# Altium PCB MLX9039SLW.PcbDoc
Units mm, origin at the board's own origin, x right, y up, seen from the top; angles counter-clockwise.
Board outline 28 x 28 mm, 2 copper layers (Top Layer, Bottom Layer); 13 components, 11 nets, 53 pads, 32 vias.
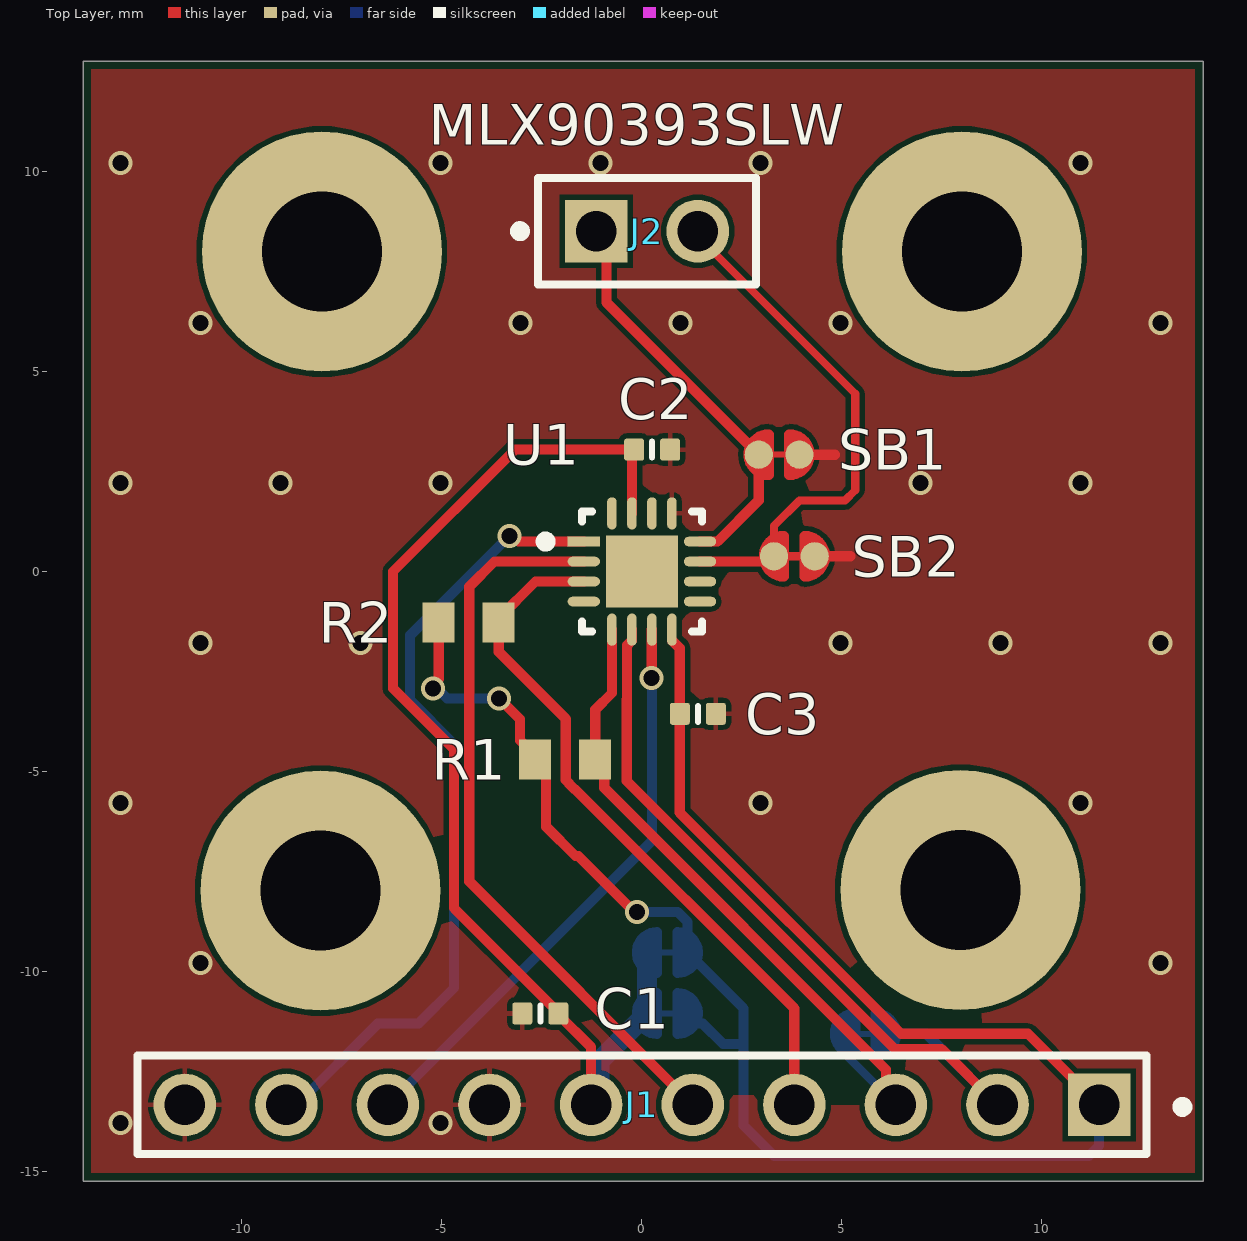
[diagram p0: Top Layer view]
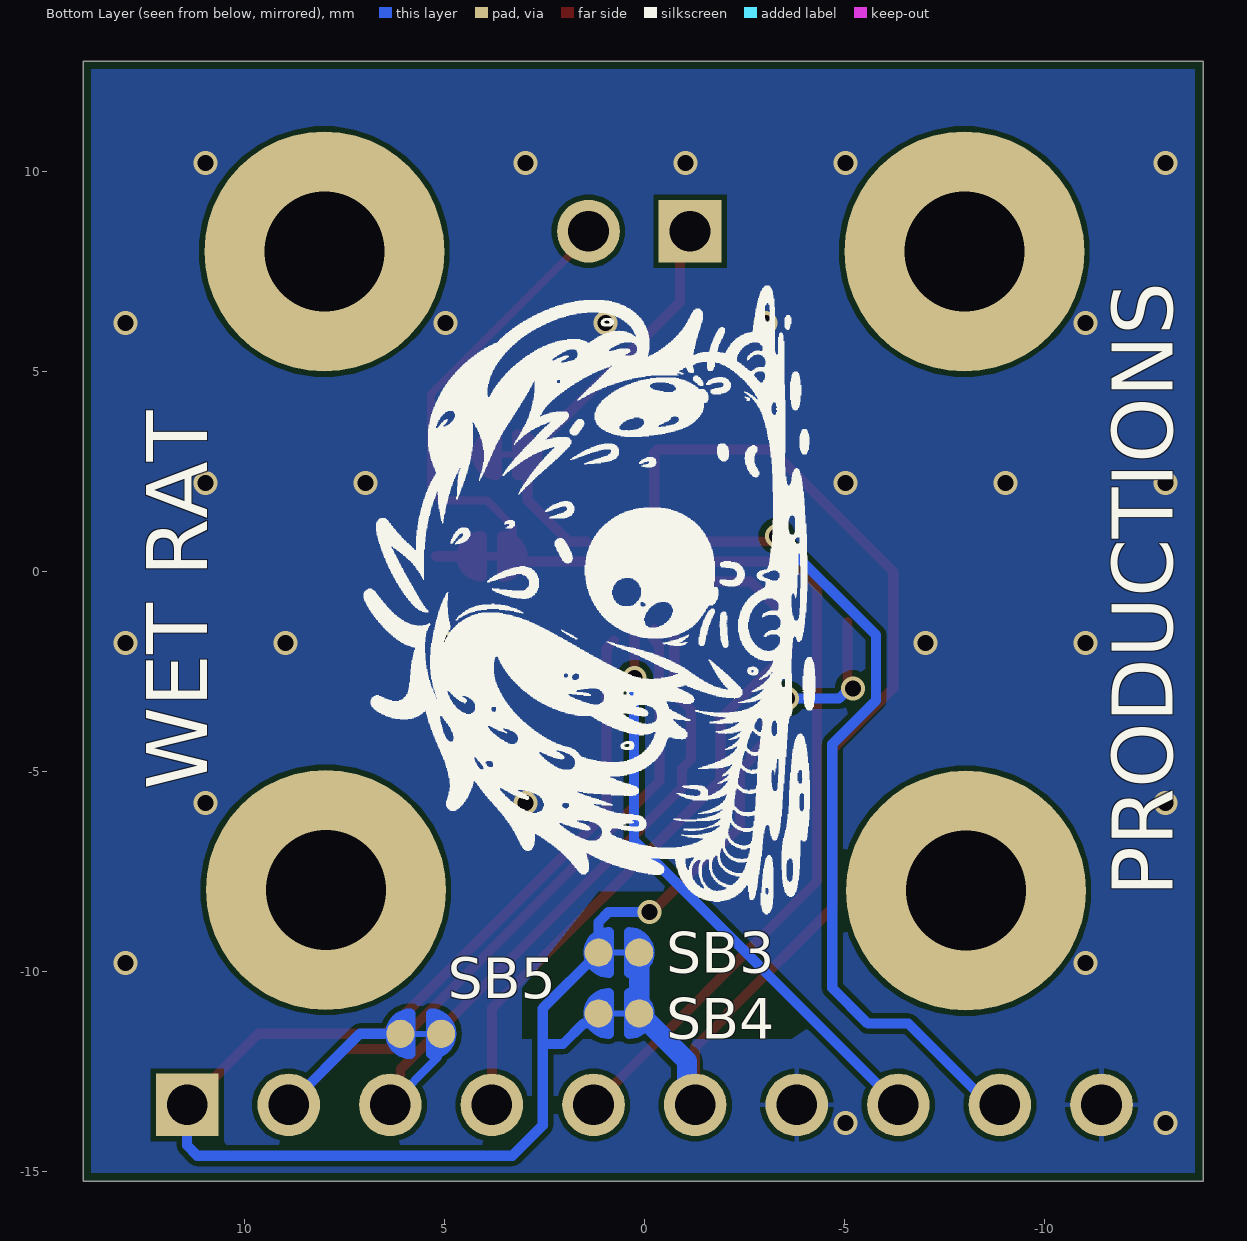
[diagram p1: Bottom Layer view, seen from below]
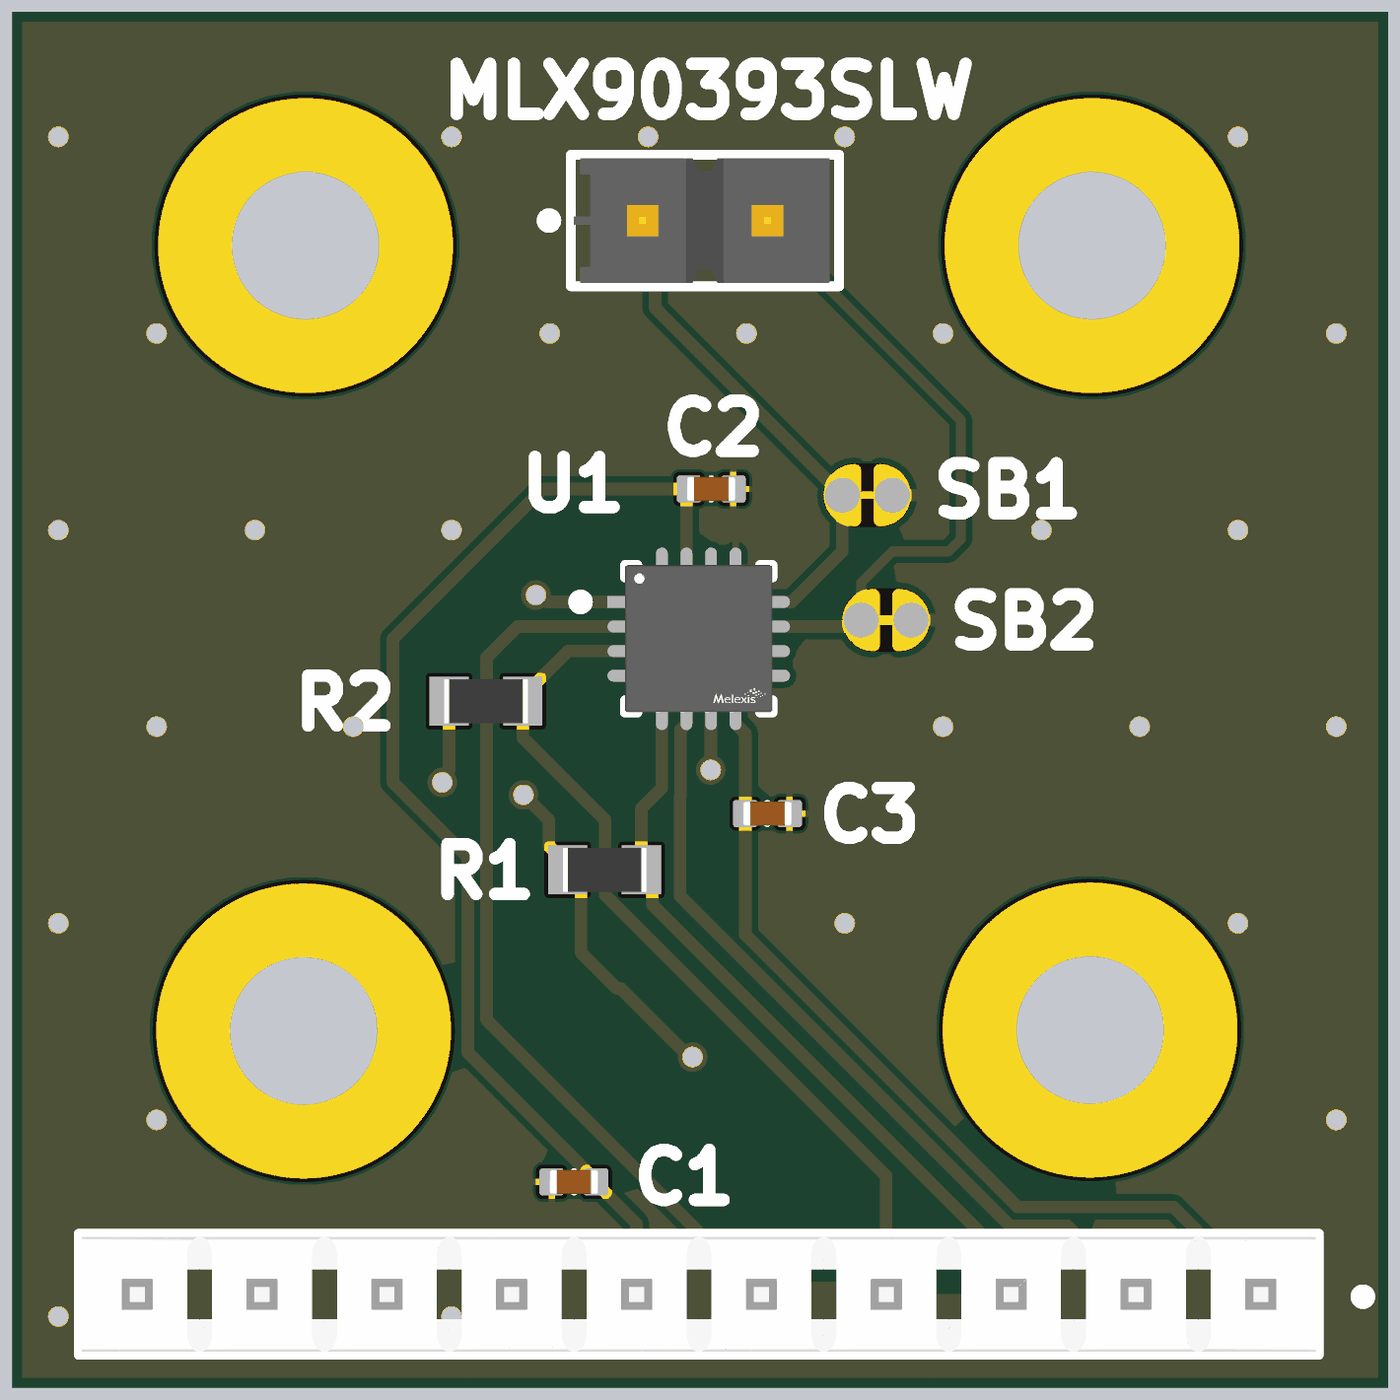
[diagram p2: 3D render of the assembled board from above, using the file's embedded part models]

## Layer stack, top to bottom
Top Solder: solder mask 0.0102, Solder Resist, Dk 3.5
Top Layer: signal copper 0.0356
Dielectric 1: dielectric 0.32, FR-4, Dk 4.8
Bottom Layer: signal copper 0.0356
Bottom Solder: solder mask 0.0102, Solder Resist, Dk 3.5

## Board outline
-13.97,-15.24 -13.97,12.76 14.03,12.76 14.03,-15.24

## Design rules (kind name [scope] priority, off if disabled: settings)
BoardOutlineClearance [All] p1: gap=0.2 ignorepadtopadclearanceinfootprint=FALSE
Clearance [All] p1: gap=0.127 ignorepadtopadclearanceinfootprint=FALSE except(0.25: Arc-Hole Track-Hole SMDPad-Hole THPad-Hole Via-Hole Fill-Hole Poly-Hole Region-Hole Text-Hole)
ComponentClearance [All] p1: gap=0.127 collisioncheckmode=3 verticalgap=0.127 showdistances=TRUE
DiffPairsRouting [All] p1: maxlimit=0.254 minlimit=0.127 mostfreqgap=0.127 toplayer_minwidth=0.127 toplayer_maxwidth=25.4 toplayer_prefwidth=0.127 bottomlayer_minwidth=0.127 bottomlayer_maxwidth=25.4 bottomlayer_prefwidth=0.127 maxuncoupledlength=12.7
Height [All] p1: minheight=0 maxheight=1816.048 prefheight=12.7
HoleSize [All] p1: absolutevalues=TRUE maxlimit=6.3 minlimit=0.3 maxpercent=80.000 minpercent=20.000
HoleToHoleClearance [All] p1: gap=0.25 allowstackedmicrovias=FALSE
MinimumAnnularRing [All] p1: minimumring=0.076
MinimumSolderMaskSliver [All] p1: minsoldermaskwidth=0
PlaneClearance [All] p1: clearance=0.127
PlaneConnect PlaneConnectPowerPads [InPadClass('PowerPads')] p1: planeconnectstyle=Direct reliefexpansion=0.508 reliefentries=4 reliefconductorwidth=0.254 reliefairgap=0.254
PlaneConnect [All] p2: pad.planeconnectstyle=Relief pad.reliefexpansion=0.3 pad.reliefentries=4 pad.reliefconductorwidth=0.127 pad.reliefairgap=0.127 via.planeconnectstyle=Direct via.reliefexpansion=0.3 via.reliefentries=4 via.reliefconductorwidth=0.127 via.reliefairgap=0.127
PolygonConnect PolygonConnectPowerPads [All vs (InPadClass('PowerPads'))] p1: connectstyle=Direct reliefconductorwidth=0.254 reliefentries=4 polygonreliefangle="90 Angle" airgapwidth=0.254
PolygonConnect [All] p2: thpad.connectstyle=Relief thpad.reliefconductorwidth=0.127 thpad.reliefentries=4 thpad.polygonreliefangle="90 Angle" thpad.airgapwidth=0.127 smdpad.connectstyle=Relief smdpad.reliefconductorwidth=0.127 smdpad.reliefentries=4 smdpad.polygonreliefangle="90 Angle" smdpad.airgapwidth=0.127 via.connectstyle=Direct via.reliefconductorwidth=0.127 via.reliefentries=4 via.polygonreliefangle="90 Angle" via.airgapwidth=0.127
RoutingVias [All] p1: holewidth=0.3 width=0.6 viastyle="Through Hole" minholewidth=0.3 minwidth=0.6 maxholewidth=0.6 maxwidth=6.6
SilkToSilkClearance [All] p1: silktosilkclearance=0
SilkToSolderMaskClearance [IsPad] p1: minsilkscreentomaskgap=0.127 clearancetoexposedcopper=TRUE
SolderMaskExpansion [All] p1: expansion=0.075 istentingtop=FALSE
Width [All] p1: maxlimit=25.4 minlimit=0.127 preferedwidth=0.127 minimp=50.000000 maximp=50.000000 favimp=50.000000
20 further rules are at their usual default settings.

## Components (designator, comment, footprint, x,y, rotation, side; value= is the part's Value field where it differs from the comment)
C1 "Capacitor 1µF +/-20% 10V 0402" CAPC0402(1005)60_L -2.54,-11.049 r180 top value=1µF
C2 "Capacitor 100nF +/-20% 25V 0402" CAPC0402(1005)60_L 0.254,3.048 r0 top value=100nF
C3 "Capacitor 100nF +/-20% 25V 0402" CAPC0402(1005)60_L 1.397,-3.556 r0 top value=100nF
J1 "4-644456-0" FP-4-644456-0-MFG 0,-13.335 r0 top
J2 "TSW-102-07-F-S" FP-TSW-102-07-F-S-MFG 0.127,8.509 r0 top
R1 "Resistor 10k +/-1% 0603 100 mW" RESC1608X55X25ML10T15 -1.917,-4.699 r0 top value=10k
R2 "Resistor 10k +/-1% 0603 100 mW" RESC1608X55X25ML10T15 -4.33,-1.27 r0 top value=10k
SB1 "Solder Bridge" "Solder Bridge-Footprint-1"#1 3.429,2.921 r0 top
SB2 "Solder Bridge" "Solder Bridge-Footprint-1"#1 3.81,0.381 r0 top
SB3 "Solder Bridge" "Solder Bridge-Footprint-1"#1 0.635,-9.525 r0 bottom
SB4 "Solder Bridge" "Solder Bridge-Footprint-1"#1 0.635,-11.049 r0 bottom
SB5 "Solder Bridge" "Solder Bridge-Footprint-1"#2 5.588,-11.557 r180 bottom
U1 "MLX90393SLW-ABA-011-RE" FP-MLX90393SLW-ABA-011-RE-IPC_B 0,0 r0 top

## Footprints (in the part's own frame and the unit in brackets; to place one, negate y for a bottom-side part, rotate by r counter-clockwise, add the part's x,y. Pads: shape width x height; smd on the part's side, far side on the other; paste and mask are expansions set on the pad)
CAPC0402(1005)60_L [mm] "Chip Capacitor, Body 1.0x0.5mm, Height 0.6mm, IPC High Density"
  rrect25% 0.5x0.55 smd: 1(-0.45,0) 2(0.45,0)
  silkscreen extent 0,-0.2 0,0.2, body extent -0.5,-0.25 0.5,0.25, height 0.6
FP-4-644456-0-MFG [mil]
  rect 61.65x61.65 hole 40 paste-39370.1 mask+0: 1(450,0)
  round 61.65 hole 40 paste-39370.1 mask+0: 2(350,0) 3(250,0) 4(150,0) 5(50,0) 6(-50,0) 7(-150,0) 8(-250,0) 9(-350,0) 10(-450,0)
  silkscreen extent -497,-48 537,48, body extent -500,-52 500,52, height 10
FP-MLX90393SLW-ABA-011-RE-IPC_B [mm]
  rect 0.806x0.239 smd paste+0 mask+0: 1(-1.453,0.75)
  rrect100% 0.806x0.239 smd paste+0 mask+0: 2(-1.453,0.25) 3(-1.453,-0.25) 4(-1.453,-0.75) 9(1.453,-0.75) 10(1.453,-0.25) 11(1.453,0.25) 12(1.453,0.75)
  rrect100% 0.239x0.806 smd paste+0 mask+0: 5(-0.75,-1.453) 6(-0.25,-1.453) 7(0.25,-1.453) 8(0.75,-1.453) 13(0.75,1.453) 14(0.25,1.453) 15(-0.25,1.453) 16(-0.75,1.453)
  rect 1.8x1.8 smd paste-1000 mask+0: 17(0,0)
  silkscreen extent -2.53,-1.5 1.5,1.5, body extent -2.11,-2.11 2.11,2.11, height 0.25
FP-TSW-102-07-F-S-MFG [mm]
  rect 1.57x1.57 hole 1.02 paste-2539.97 mask+0: 1(-1.27,0)
  round 1.57 hole 1.02 paste-2539.97 mask+0: 2(1.27,0)
  silkscreen extent -3.3,-1.34 2.73,1.34, body extent -2.83,-1.44 2.83,1.44, height 0.25
RESC1608X55X25ML10T15 [mm] "Chip Resistor, 2-Leads, Body 1.70x0.90mm, IPC Low Density"
  rect 0.8x1 smd: 1(-0.75,0) 2(0.75,0)
  body extent -0.85,-0.45 0.85,0.45, height 0.55
"Solder Bridge-Footprint-1"#1 [mil]
  round 27.8 smd mask+0: 1(-20,0) 2(20,0)
  Top Layer region: -10,-20 -20,-20 -25,-15 -30,0 -30,10 -20,20 -10,20
  Top Layer region: 10,20 20,20 25,15 30,0 30,-10 20,-20 10,-20
  Top Layer lines w6: -20,0 20,0
  Top Layer lines w10: -10,-20 cw(c-10,0) -10,20 -10,-20 ; 10,-20 ccw(c10,0) 10,20 10,-20
"Solder Bridge-Footprint-1"#2 [mil]
  round 27.8 smd mask+0: 1(-20,0) 2(20,0)
  Top Layer region: -10,-20 -20,-20 -25,-15 -30,0 -30,10 -20,20 -10,20
  Top Layer region: 10,20 20,20 25,15 30,0 30,-10 20,-20 10,-20
  Top Layer lines w6: 20,0 10,0 -10,0 -20,0
  Top Layer lines w10: 17.1,-18.7 cw(c10,0) 10,-20 10,0 10,20 cw(c10,0) 17.1,-18.7 ; -10,-20 cw(c-10,0) -10,20 -10,0 -10,-20

## Part data
C1: library part CMP-001-00063-3, "Chip Capacitor, 1µF +/-20%, 10V, 0402, Thickness 0.6 mm", Case/Package=0402, Max Operating Temperature=85°C, Min Operating Temperature=-55°C, Tolerance=10%, Voltage Rating=10V, Mounting Technology=SMT, Pins=2
C2 C3: library part CMP-001-00065-4, "Chip Capacitor, 100nF +/-20%, 25V, 0402, Thickness 0.6 mm", Case/Package=0402, Max Operating Temperature=85°C, Min Operating Temperature=-55°C, Tolerance=10%, Voltage Rating=25V, Mounting Technology=SMT, Pins=2
J1: library part CMP-002-00078-1, "Conn Unshrouded Header HDR 10 POS 2.54mm Solder ST Top Entry Thru-Hole Bag/Box", Color=Natural, Contact Current Rating=5A, Contact Resistance=6mR, Flammability Rating="UL94 V-0", Max Operating Temperature=221°C, Max Voltage Rating (AC)=250V, Min Operating Temperature=-67°C, Package Quantity=500, Approvals=CSA, Backwall/Post Interruptions="No (Without)", Circuit Application=Signal, Connector System=Wire-to-Board, Connector Type=Plug,Header,Pin, Contact Gender=Male, Contact Material="Copper Alloy", Contact Mating Length=7.49mm, Contact Plating=Tin,Matte, Contact Retention="No (Without)", Contact Shape=Square, Contact Style=Straight, Contact Type="Male Pin", Current Rating=5A, Depth=2.33mm, ELV=Compliant, Gender=Male, Height=10.03mm, Housing Color=Natural, Housing Material=Polyester, Lead Free="Lead Free", Length=25.1mm, Mating Alignment="No (Without)", Mating Retention="No (Without)", Mounting Technology="Through Hole", Number of Contacts=10, Number of Positions=10, Number of Rows=1, Operating Supply Voltage=250V, Orientation=Straight, Packaging=Bag, PCB Mount Alignment="No (Without)", PCB Mount Retention=Without, PCB Mounting Orientation=Vertical, PCB Thickness=0.063inch, Pitch=2.54mm, Plating=Tin, Plating Thickness=1.27um, Radiation Hardening=No, RoHS Compliant=Yes, Sealable="No (Without)", Series=MTA-100, Shrouded="No (Without)", Strain Relief="No (Without)", Tail Length=0.11inch, Termination=Solder, Underplate Material=Nickel, Voltage Rating=250V, Voltage Rating (AC)=250V
J2: library part CMP-002-00073-1, "Conn Unshrouded Header HDR 2 POS 2.54mm Solder ST Top Entry Thru-Hole Bag"
R1 R2: library part CMP-009-00017-5, "Chip Resistor, 10 KOhm, +/- 1%, 01 W, -55 to 155 degC, 0603 (1608 Metric)", Case/Package=0603, Max Operating Temperature=155°C, Min Operating Temperature=-55°C, Power=100mW, Tolerance=1%, Voltage Rating=50V, Mounting Technology=SM, Pins=2, RoHS Compliant=True
SB1 SB2 SB3 SB4 SB5: library part CMP-001-0004-3, "Solder Bridge 10mil gap 6mil short"
U1: library part CMP-001-0003-1, "Triaxis® Magnetic node - Micropower Magnetometer ft. SPI/I2C Output - I2C_addres", Case/Package=QFN, Max Operating Temperature=85°C, Min Operating Temperature=-20°C, Axis="X, Y, Z", Mounting Technology="Surface Mount", Output Type=SPI,I2C, Packaging="Cut Tape", RoHS Compliant=Yes, Series="Automotive, AEC-Q100, Triaxis®"

## Free pads (board coordinates)
  round 6 hole 3: 0(-8.038,-7.98) 0(-8,8) 0(7.962,-7.96) 0(8,8)

## Via types
v1: diameter 0.6, hole 0.4, Top Layer to Bottom Layer, tented both sides, 32 vias

## Nets (pads, with @x,y where several pads share a name; then routed paths per layer and width w, separated by ;. In a path a pad name is that pad's centre, name@x,y a point inside that pad or via, vN(x,y) a via of type N, cw(c..) or ccw(c..) an arc to the next point about the centre after c; other vN are vias at no path point)
A0: J2.1 SB1.1 U1.12 | length 9.9
  Top Layer w0.254: J2.1 -0.889,8.255 -0.889,6.731 2.712,3.13 SB1.1 ; U1.12 1.893,0.75 2.921,1.778 2.921,2.481
A1: J2.2 SB2.1 U1.11 | length 12.9
  Top Layer w0.203: J2.2 1.397,8.382 5.334,4.445 5.334,2.032 5.08,1.778 3.937,1.778 3.302,1.143 3.302,0.821 SB2.1
  Top Layer w0.254: U1.11 SB2.1@3.065,0.25
INT: J1.9 U1.1 | length 20.1
  Top Layer w0.254: v1(-3.313,0.889) -3.219,0.889 -3.08,0.75 U1.1
  Bottom Layer w0.254: J1.9 -8.636,-13.335 -6.604,-11.303 -5.588,-11.303 -4.699,-10.414 -4.699,-4.318 -5.795,-3.222 -5.795,-1.593 v1(-3.313,0.889)
INT/TRG: J1.8 U1.7 | length 14.6
  Top Layer w0.254: v1(0.243,-2.667) 0.246,-2.664 0.246,-1.457 U1.7
  Bottom Layer w0.254: J1.8 0.254,-6.731 0.254,-2.678 v1(0.243,-2.667)
MISO: J1.2 SB5.1 U1.6 | length 20
  Top Layer w0.254: U1.6 -0.25,-1.722 -0.369,-1.841 -0.369,-3.194 -0.381,-3.206 -0.381,-5.238 6.319,-11.938 7.493,-11.938 J1.2
  Bottom Layer w0.254: SB5.1 7.112,-11.557 J1.2
MS/CS: J1.5 U1.2 | length 18.4
  Top Layer w0.254: U1.2 -3.687,0.25 -4.318,-0.381 -4.318,-7.747 J1.5
SCL/SCLK: J1.4 R2.2 U1.3 | length 17.7
  Top Layer w0.254: U1.3 -2.66,-0.25 -3.58,-1.17 R2.2 -3.58,-2.008 -1.905,-3.683 -1.905,-5.207 -1.821,-5.291 -1.821,-5.304 -1.672,-5.453 -1.659,-5.453 3.81,-10.922 J1.4
SDA/MOSI: J1.3 R1.2 SB5.2 U1.5 | length 17.5
  Top Layer w0.254: U1.5 -0.75,-3.036 -1.167,-3.453 R1.2 -0.944,-4.922 -0.944,-5.406 6.099,-12.449 6.099,-13.084 J1.3
  Bottom Layer w0.152: SB5.2 SB5.2@5.154,-11.631 ; 5.154,-12.139 5.154,-12.032
  Bottom Layer w0.203: 5.154,-12.139 J1.3 ; 5.154,-12.032 SB5.2@5.154,-11.631
VDD: C1.1 C2.1 J1.6 SB3.1 SB4.1 U1.15 | length 28.3
  Top Layer w0.254: J1.6 -1.27,-11.894 -2.09,-11.074 C1.1 -2.09,-11.024 -4.699,-8.415 -4.699,-4.445 -6.223,-2.921 -6.223,0 -3.175,3.048 -0.323,3.048 -0.25,2.975 U1.15
  Bottom Layer w0.508: J1.6 -1.068,-13.133 -1.068,-12.244 SB4.1@-0.082,-11.258 ; SB4.1 0.127,-10.609 0.127,-9.965 SB3.1
VDD_IO: C3.1 J1.1 R1.1 R2.1 SB3.2 SB4.2 U1.8 | length 47.3
  Top Layer w0.254: v1(-5.218,-2.921) -5.218,-2.827 -5.08,-2.689 R2.1 ; v1(-3.567,-3.175) -3.048,-3.694 -3.048,-4.218 -2.667,-4.599 R1.1 -2.394,-4.972 -2.394,-6.38 -1.662,-7.112 -1.593,-7.112 -0.196,-8.509 v1(-0.127,-8.509) ; U1.8@0.757,-1.729 0.947,-1.919 0.947,-6.027 6.477,-11.557 9.652,-11.557 J1.1
  Bottom Layer w0.254: v1(-5.218,-2.921) -5.124,-2.921 -4.87,-3.175 v1(-3.567,-3.175) ; v1(-0.127,-8.509) 0.889,-8.509 1.143,-8.763 SB3.2 2.54,-10.922 2.54,-11.811 ; SB4.2 1.397,-11.303 1.524,-11.303 2.032,-11.811 2.54,-11.811 ; J1.1 11.43,-14.351 11.176,-14.605 3.302,-14.605 2.54,-13.843 2.54,-11.811
VSS: C1.2 C2.2 C3.2 J1.7 J1.10 SB1.2 SB2.2 U1.13 | length 1.8
  Top Layer w0.254: SB1.2 4.826,2.921 ; SB2.2 5.207,0.381
  other v1: -13.03,-13.788 -5.03,-13.788 -11.03,-9.788 12.97,-9.788 -13.03,-5.788 2.97,-5.788 10.97,-5.788 -11.03,-1.788 -7.03,-1.788 4.97,-1.788 8.97,-1.788 12.97,-1.788 -13.03,2.212 -9.03,2.212 -5.03,2.212 6.97,2.212 10.97,2.212 -11.03,6.212 -3.03,6.212 0.97,6.212 4.97,6.212 12.97,6.212 -13.03,10.212 -5.03,10.212 -1.03,10.212 2.97,10.212 10.97,10.212
pads on no net: U1.4 U1.9 U1.10 U1.14 U1.16 U1.17

## Polygon pours and split planes (outlines as drawn)
VSS on Top Layer "VSS_L01_P000" (solid, remove dead copper, pour order 0): -13.97,12.827 -13.97,-15.24 14.03,-15.24 14.03,12.827
VSS on Bottom Layer "VSS_L02_P001" (solid, remove dead copper, pour order 1): -13.97,12.7 -13.97,-15.24 13.97,-15.24 13.97,12.827

## Other copper
Top Layer:
  pour cut-out: 3.81,-13.335 6.35,-13.335 6.35,-12.192 3.81,-10.541
  pour cut-out: 1.016,-13.081 -4.064,-7.62 -4.191,-3.302 -3.048,-3.302 -3.048,-5.207 -1.651,-5.207 3.81,-10.922 3.81,-13.081
Bottom Layer:
  pour cut-out: -3.683,-11.684 3.048,-11.684 3.048,-10.414 1.143,-8.001 -0.635,-8.001 -4.064,-11.43

## Silkscreen, mask and mechanical layers (free items; w line width, h text height)
Top Overlay:
  text "MLX90393SLW" at -5.334,10.668 h1.02
Bottom Overlay:
  drawing of 39 lines, arcs and shapes, not listed
  text "WET RAT" at 10.922,-5.461 h1.52 r270
  text "PRODUCTIONS" at -13.208,-8.128 h1.52 r270
Mechanical 1:
  the board outline again, w0.254